# Altium PCB LUX_ZQ19.PcbDoc
Units mm, origin at the board's own origin, x right, y up, seen from the top; angles counter-clockwise.
Board outline 72.59 x 68.02 mm, 2 copper layers (Top, Bottom), stack 0.323 mm thick; 79 components, 75 nets, 256 pads, 91 vias.
Unrouted connection lines stored in the file: 1.
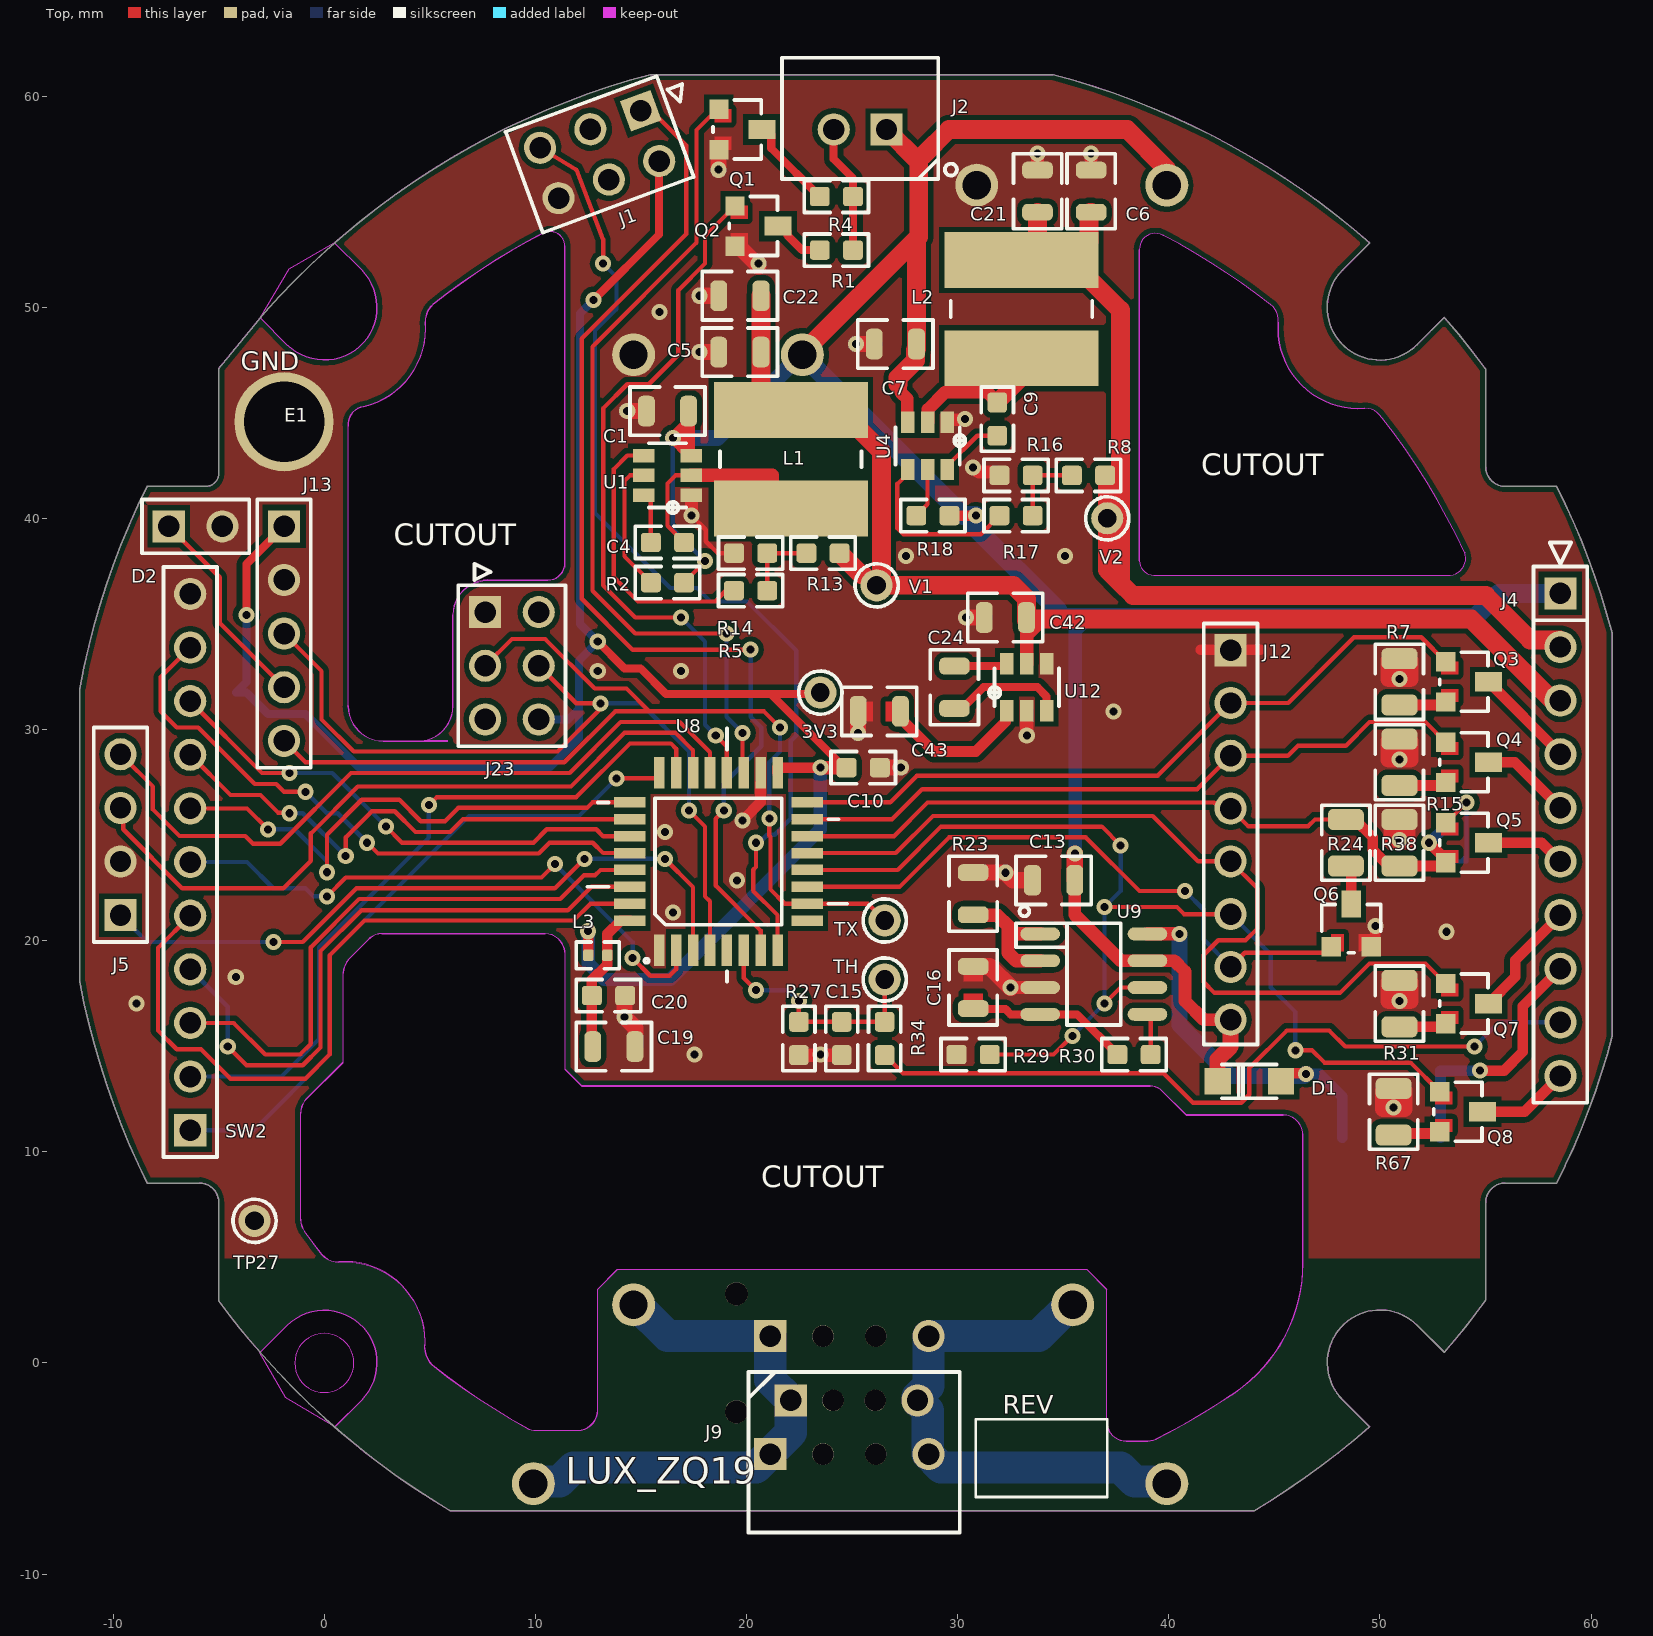
[diagram p0: Top view]
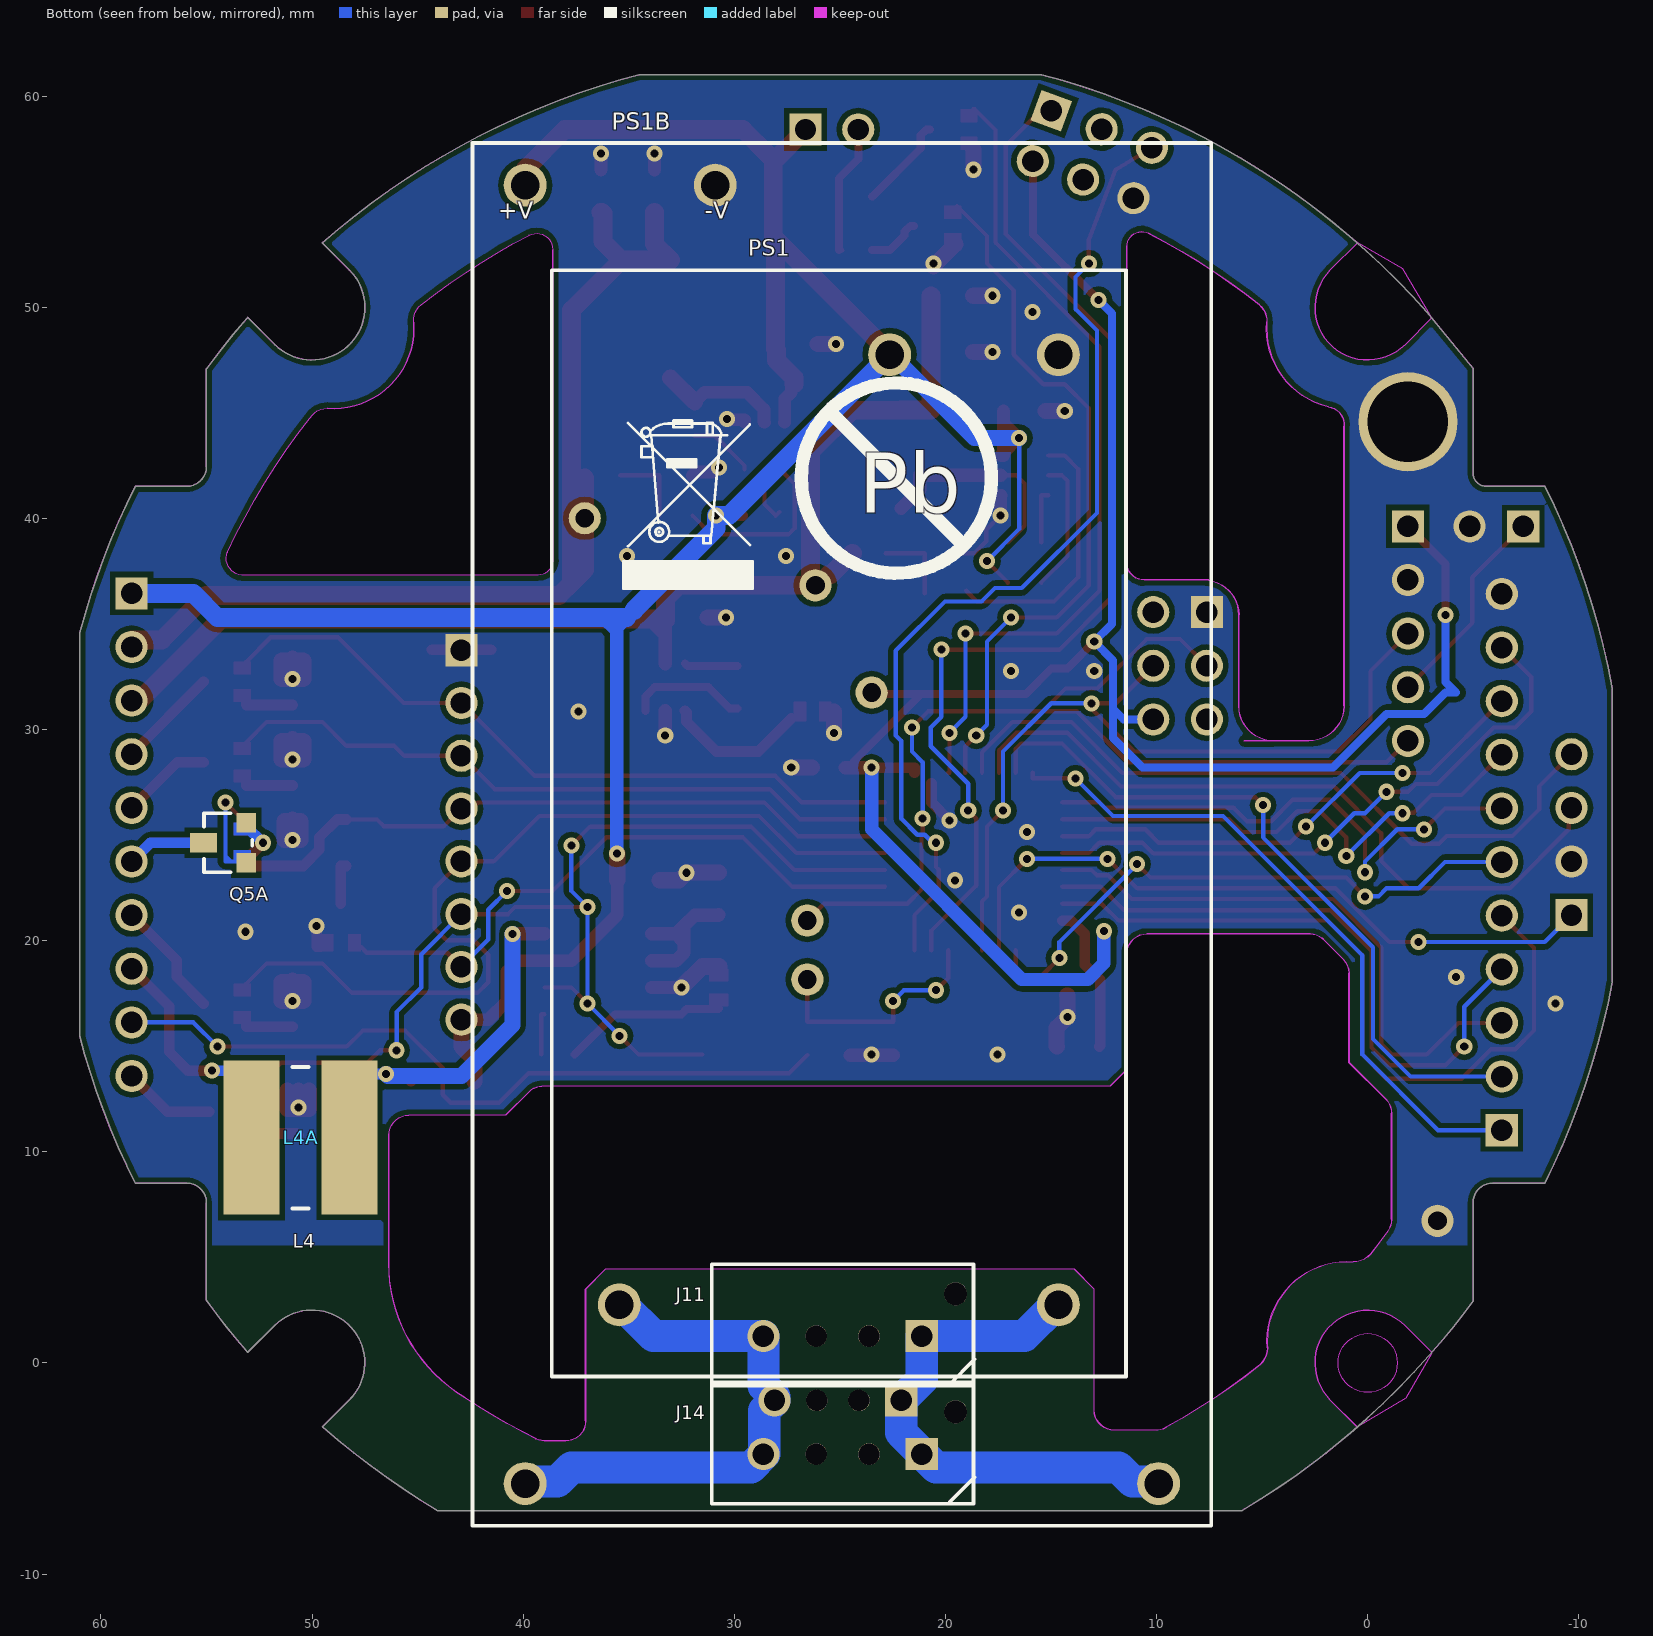
[diagram p1: Bottom view, seen from below]

## Layer stack, top to bottom
Solder Mask Top: solder mask 0.0102, Solder Resist, Dk 3.5
Top: signal copper 0.0343
Dielectric 1: dielectric 0.254, FR-4, Dk 4.3
Bottom: signal copper 0.0343
Solder Mask Bottom: solder mask 0.0102, Solder Resist, Dk 3.5

## Board outline
-11.58,18.052 -11.582,31.931 -11.583,31.927 cw(c23.315,25.648) -8.395,41.516 -5.626,41.516 -5.627,41.516 ccw(c-5.629,42.154) -4.991,42.151 -4.991,47.104 -2.816,49.759 cw(c24.918,25.226) 15.456,61.023 34.506,61.023 34.529,61.017 cw(c25.038,25.08) 49.519,53.049 48.233,51.763 ccw(c49.998,49.998) 51.763,48.233 53.05,49.519 53.055,49.514 cw(c25.608,25.551) 55.004,47.079 55.004,42.456 55.004,42.457 ccw(c55.953,42.465) 55.944,41.516 58.382,41.516 58.382,41.515 cw(c25.863,25.287) 60.998,34.582 60.998,15.456 61.006,15.485 cw(c26.008,24.697) 58.382,8.522 55.944,8.522 ccw(c55.945,7.58) 55.004,7.582 55.004,2.959 55.018,2.98 cw(c29.15,21.572) 53.043,0.501 51.768,1.775 ccw(c50.003,0.01) 48.238,-1.756 49.508,-3.026 49.498,-3.036 cw(c24.8,25.168) 44.056,-6.998 5.956,-6.998 5.938,-6.987 cw(c24.703,24.623) -2.9,0.345 cw(c19.375,20.483) -4.991,2.934 -4.991,7.582 -4.991,7.581 ccw(c-5.924,7.589) -5.931,8.522 -8.395,8.522 -8.385,8.502 cw(c24.43,24.791)
cut-out: 1.765,-1.765 0.495,-3.023 -1.816,-1.651 -3.046,0.484 -1.765,1.765 cw(c0,0)
cut-out: -1.765,48.235 -3.023,49.505 -1.651,51.816 0.484,53.046 1.765,51.765 cw(c0,50)
cut-out: -1.4,0 ccw(c0,0) 0,-1.4 ccw(c0,0) 1.4,0 ccw(c0,0) 0,1.4 ccw(c0,0)
cut-out: 2.787,29.451 ccw(c2.787,29.454) 2.787,29.451 ccw(c2.796,31.068) 2.788,29.451 ccw(c2.788,29.463) 2.788,29.451 5.842,29.451 ccw(c5.842,29.464) 5.855,29.464 ccw(c5.842,29.464) 5.842,29.477 4.731,29.477 ccw(c4.436,31.124) 6.109,31.115 ccw(c6.108,31.115) 6.109,31.115 6.109,35.433 cw(c7.756,35.424) 7.726,37.071 10.592,37.071 ccw(c10.589,37.893) 11.39,37.709 ccw(c11.398,37.719) 11.411,37.719 11.411,52.876 cw(c11.236,52.876) 11.411,52.876 ccw(c10.696,52.876) 10.385,53.521 ccw(c10.388,53.508) 10.383,53.52 ccw(c25.183,24.845) 5.139,50.134 ccw(c5.147,50.124) 5.136,50.13 ccw(c5.14,50.118) 5.131,50.128 ccw(c5.846,49.328) 4.773,49.305 ccw(c4.786,49.305) 4.774,49.303 ccw(c4.786,49.302) 4.774,49.301 cw(c0.979,48.996) 4.786,48.996 cw(c0.98,48.996) 1.858,45.293 ccw(c1.959,44.458) 1.124,44.365 ccw(c3.463,44.621) 1.124,44.364 1.124,44.365 1.124,31.115 ccw(c1.137,31.115) 1.124,31.114 cw(c1.381,31.116) 1.124,31.115 1.124,31.114 ccw(c2.797,31.124)
cut-out: -0.126,5.132 ccw(c0.7,5.902) 0.692,4.772 ccw(c0.694,4.785) 0.695,4.772 cw(c0.99,1.016) 4.758,1.016 cw(c0.994,1.016) 4.747,0.721 cw(c4.747,0.72) 4.747,0.72 cw(c4.759,0.719) 4.747,0.721 4.747,0.72 ccw(c4.76,0.719) 4.747,0.718 ccw(c5.922,0.744) 5.097,-0.094 ccw(c5.109,-0.088) 5.101,-0.098 ccw(c25.179,25.235) 9.557,-3.065 ccw(c9.564,-3.053) 9.572,-3.063 ccw(c9.585,-3.065) 9.578,-3.076 ccw(c10.001,-2.385) 10.038,-3.194 ccw(c9.966,-1.596) 10.039,-3.194 10.038,-3.194 12.008,-3.194 ccw(c12,-2.233) 12.961,-2.242 ccw(c12.954,-2.242) 12.961,-2.241 12.961,3.493 13.893,4.426 36.107,4.426 37.039,3.493 37.039,-2.75 ccw(c37.992,-2.75) 37.992,-3.702 38.99,-3.702 ccw(c38.99,-3.689) 38.992,-3.702 ccw(c38.992,-3.689) 38.993,-3.702 ccw(c38.94,-2.537) 39.383,-3.616 ccw(c39.384,-3.603) 39.39,-3.615 ccw(c26.557,22.013) 39.418,-3.601 ccw(c39.321,-3.406) 39.42,-3.6 ccw(c25.491,24.142) 42.76,-1.654 ccw(c42.753,-1.643) 42.764,-1.65 ccw(c42.762,-1.637) 42.769,-1.648 ccw(c38.922,4.728) 46.369,4.728 ccw(c39.035,4.728) 46.368,4.827 46.368,10.795 ccw(c46.362,10.795) 46.368,10.796 ccw(c46.362,10.796) 46.368,10.796 ccw(c45.408,10.788) 45.415,11.748 40.828,11.744 39.694,12.879 ccw(c39.114,12.299) 39.114,13.119 12.197,13.119 11.418,13.899 11.418,19.355 ccw(c10.687,19.358) 11.418,19.36 ccw(c10.444,19.36) 10.465,20.333 ccw(c10.465,20.333) 10.465,20.333 ccw(c10.464,20.323) 10.464,20.333 10.465,20.333 cw(c10.465,20.331) 10.465,20.333 2.726,20.333 cw(c2.726,20.323) 2.727,20.333 2.726,20.333 ccw(c2.719,19.451) 2.052,20.028 2.052,20.029 1.155,19.131 ccw(c1.163,19.123) 1.154,19.131 cw(c1.164,19.121) 1.155,19.131 1.154,19.13 ccw(c2.007,18.384) 0.876,18.459 ccw(c0.892,18.457) 0.876,18.458 0.876,14.229 -0.856,12.505 ccw(c-0.847,12.496) -0.856,12.505 ccw(c-0.844,12.493) -0.857,12.504 ccw(c-0.162,11.82) -1.137,11.83 ccw(c-1.132,11.83) -1.137,11.829 ccw(c-1.123,11.83) -1.137,11.829 cw(c-1.1,11.831) -1.137,11.829 -1.137,6.795 ccw(c-1.124,6.795) -1.137,6.794 ccw(c-1.124,6.794) -1.137,6.793 ccw(c0.024,6.862) -0.959,6.24 ccw(c-0.948,6.248) -0.957,6.238 ccw(c-0.946,6.245) -0.957,6.237 ccw(c23.626,23.837) -0.133,5.14 ccw(c-0.123,5.148) -0.129,5.137 ccw(c-0.116,5.14)
cut-out: 38.602,37.999 ccw(c39.296,38.007) 39.293,37.313 53.33,37.313 ccw(c53.26,38.111) 54.009,38.399 54.018,38.379 ccw(c23.94,24.29) 50.101,44.754 50.093,44.764 ccw(c49.28,44.254) 49.28,45.214 49.283,45.214 cw(c48.978,49.003) 45.188,49.302 45.189,49.304 ccw(c44.301,49.398) 44.831,50.117 44.84,50.11 ccw(c24.591,24.378) 39.724,53.415 39.726,53.414 ccw(c39.371,52.731) 38.602,52.731

## Design rules (kind name [scope] priority, off if disabled: settings)
Clearance Clearance_1 [All vs InPolygon] p1: gap=0.254 ignorepadtopadclearanceinfootprint=FALSE
Clearance [All] p2: gap=0.203 ignorepadtopadclearanceinfootprint=FALSE
ComponentClearance [All] p1: gap=0 collisioncheckmode=3 verticalgap=0 showdistances=FALSE
FanoutControl Fanout_LCC [IsLCC] p1: bgadir=Out bgaviamode=Centered fanoutstyle=Auto fanoutdirection=Alternating viagrid=0.025 // Fanout_LCC (Default Rule)
FanoutControl Fanout_BGA [IsBGA] p2: bgadir=Out bgaviamode=Centered fanoutstyle=Auto fanoutdirection=Alternating viagrid=0.025 // Fanout_BGA (Default Rule)
FanoutControl Fanout_Small [(CompPinCount < 5)] p3: bgadir=Out bgaviamode=Centered fanoutstyle=Auto fanoutdirection=OutThenIn viagrid=0.025 // Fanout_Small (Default Rule)
FanoutControl Fanout_SOIC [IsSOIC] p4: bgadir=Out bgaviamode=Centered fanoutstyle=Auto fanoutdirection=Alternating viagrid=0.025 // Fanout_SOIC (Default Rule)
HoleSize [All] p1: absolutevalues=TRUE maxlimit=5.08 minlimit=0.025 maxpercent=80.000 minpercent=20.000
HoleToHoleClearance [All] p1: gap=0 allowstackedmicrovias=TRUE
MinimumSolderMaskSliver [All] p1: minsoldermaskwidth=0
PolygonConnect [All] p1: connectstyle=Direct reliefconductorwidth=0.254 reliefentries=4 polygonreliefangle="90 Angle" airgapwidth=0.254
RoutingVias [All] p1: holewidth=0.381 width=0.762 viastyle="Through Hole" minholewidth=0.381 minwidth=0.762 maxholewidth=0.711 maxwidth=1.27
SilkToSilkClearance [All] p1: silktosilkclearance=0
SilkToSolderMaskClearance [IsPad] p1: minsilkscreentomaskgap=0 clearancetoexposedcopper=TRUE
SolderMaskExpansion [All] p1: expansion=0.102 istentingtop=FALSE
Width [All] p1: maxlimit=2.54 minlimit=0.127 preferedwidth=0.203
20 further rules are at their usual default settings.

## Components (designator, comment, footprint, x,y, rotation, side; value= is the part's Value field where it differs from the comment)
3V3 "0.035" 0.035 23.495,31.75 r0 top
C1 "_0805" _0805 16.256,45.085 r180 top
C4 "_0603" _0603 16.256,38.862 r0 top
C5 "_0805" _0805 19.685,47.879 r180 top
C6 "_0805" _0805 36.322,55.499 r90 top
C7 "_0805" _0805 27.051,48.26 r180 top
C9 "_0603" _0603 31.877,44.704 r90 top
C10 "_0603" _0603 25.527,28.194 r0 top
C13 "_0805" _0805 34.544,22.86 r180 top
C15 "_0603" _0603 24.511,15.367 r270 top
C16 "_0805C" _0805C 30.734,17.78 r90 top
C19 "_0805" _0805 13.716,14.986 r0 top
C20 "_0603" _0603 13.462,17.399 r0 top
C21 "_0805" _0805 33.782,55.499 r90 top
C22 "_0805" _0805 19.685,50.546 r180 top
C24 "_0805" _0805 29.845,32.004 r270 top
C42 "_0805" _0805 32.258,35.306 r180 top
C43 "_0805C" _0805C 26.289,30.861 r180 top
D1 "SOD123F" SOD123F 43.815,13.335 r0 top
D2 "SIP-2P" SIP-2P -7.366,39.624 r0 top
E1 "HOLE128AA" HOLE128AA -1.905,44.577 r0 top
J1 "2X3" 2X3 14.986,59.309 r200.22 top
J2 "JST1X2" JST1X2 25.38,58.42 r0 top
J4 "SIP-10" SIP-10 58.547,36.449 r270 top
J5 "SIP-4PA" SIP-4PA -9.652,21.209 r90 top
J9 "JST1X4-2AA" JST1X4-2AA 22.098,-1.778 r180 top
J11 "JST1X4-2" JST1X4-2 21.122,1.27 r180 bottom
J12 "SIP-8P_2.5MM" SIP-8P_2.5MM 42.926,33.757 r270 top
J13 "SIP-5P" SIP-5P -1.905,39.624 r270 top
J14 "JST1X4-2" JST1X4-2 21.122,-4.318 r180 bottom
J23 "2X3" 2X3 7.62,35.56 r270 top locked
L1 "IND.6.7MM" IND.6.7MM 22.098,42.799 r270 top (schematic designator L2)
L2 "IND.6.7MM" IND.6.7MM 33.02,49.911 r270 top
L3 "_0402" _0402 12.954,19.304 r180 top
L4 "IND.6.7MM" IND.6.7MM 50.546,10.668 r180 bottom
L4A "IND.6.7MM" IND.6.7MM 50.546,10.668 r180 bottom
PS1 "Comment" THRUHOLEPS 14.648,2.752 r90 bottom locked
PS1B "Comment" "THRUHOLEPS - duplicate" 39.906,-5.715 r180 bottom locked
Q1 "SOT23-323" SOT23-323 19.685,58.42 r270 top
Q2 "SOT23-323" SOT23-323 20.447,53.848 r270 top
Q3 "SOT23-323" SOT23-323 54.102,32.258 r270 top
Q4 "SOT23-323" SOT23-323 54.102,28.448 r270 top
Q5 "SOT23-323" SOT23-323 54.102,24.638 r270 top
Q5A "SOT23-323" SOT23-323 54.102,24.638 r90 bottom
Q6 "SOT23-323" SOT23-323 48.641,20.701 r0 top
Q7 "SOT23-323" SOT23-323 54.102,17.018 r270 top
Q8 "SOT23-323" SOT23-323 53.823,11.895 r270 top
R1 "_0603" _0603 24.257,52.705 r0 top
R2 "_0603" _0603 16.256,36.957 r180 top
R4 "_0603" _0603 24.257,55.245 r0 top (schematic designator R1)
R5 "_0603" _0603 20.193,36.576 r0 top
R7 "_0805A" _0805A 50.927,32.258 r270 top
R8 "_0603" _0603 36.195,42.037 r180 top
R13 "_0603" _0603 23.622,38.354 r180 top
R14 "_0603" _0603 20.193,38.354 r180 top
R15 "_0805A" _0805A 50.927,28.448 r270 top
R16 "_0603" _0603 32.766,42.037 r180 top
R17 "_0603" _0603 32.766,40.132 r0 top
R18 "_0603" _0603 28.829,40.132 r180 top
R23 "_0805" _0805 30.734,22.225 r270 top
R24 "_0805A" _0805A 48.387,24.638 r270 top
R27 "_0603" _0603 22.479,15.367 r270 top
R29 "_0603" _0603 30.734,14.605 r180 top
R30 "_0603" _0603 38.354,14.605 r0 top
R31 "_0805A" _0805A 50.927,17.018 r270 top
R34 "_0603" _0603 26.543,15.367 r90 top
R38 "_0805A" _0805A 50.927,24.638 r270 top
R67 "_0805A" _0805A 50.648,11.895 r270 top
SW2 "SIP-11PA" SIP-11PA -6.35,11.024 r90 top
TH "0.035" 0.035 26.543,18.161 r0 top
TP27 "0.035" 0.035 -3.302,6.731 r0 top
TX "0.035" 0.035 26.543,20.955 r0 top
U1 "TSOT2-6" TSOT2-6 16.256,42.037 r90 top
U4 "TSOT2-6" TSOT2-6 28.575,43.434 r180 top
U8 "TQFP-32" TQFP-32 18.669,23.749 r90 top
U9 "SOIC-8" SOIC-8 36.449,18.415 r270 top
U12 "TSOT2-6" TSOT2-6 33.274,32.004 r0 top
V1 "0.035" 0.035 26.162,36.83 r0 top (schematic designator TP32)
V2 "0.035" 0.035 37.084,40.005 r0 top (schematic designator TP31)

## Footprints (in the part's own frame and the unit in brackets; to place one, negate y for a bottom-side part, rotate by r counter-clockwise, add the part's x,y. Pads: shape width x height; smd on the part's side, far side on the other; paste and mask are expansions set on the pad)
0.035 [mil]
  round 60 hole 35: 1(0,0)
  silkscreen extent -40,-40 40,40
2X3 [mil]
  rect 60x60 / inner round 60 / far side rect 60x60 hole 40: 1(0,0)
  round 60 hole 40: 2(0,100) 3(100,0) 4(100,100) 5(200,0) 6(200,100)
  silkscreen extent -90,-50 250,150
_0402 [mm]
  rrect40% 0.5x0.55 smd: 1(-0.45,0) 2(0.45,0)
  silkscreen extent -1.02,-0.64 1.02,0.64
_0603 [mil]
  rrect31% 37x36 smd: 1(-31,0) 2(31,0)
  silkscreen extent -60,-30 60,30
_0805 [mm]
  rrect62% 0.8x1.45 smd: 1(-1,0) 2(1,0)
  silkscreen extent -1.78,-1.14 1.78,1.14
_0805A [mm]
  rrect50% 1x1.7 smd: 1(-1.1,0) 2(1.1,0)
  silkscreen extent -1.78,-1.14 1.78,1.14
_0805C [mm]
  rrect62% 0.8x1.45 smd: 1(-1,0) 2(1,0)
  Top region: 0.889,0.457 0.305,0.457 0.305,-0.457 0.889,-0.457 0.889,0.457
  Top region: -0.305,0.457 -0.889,0.457 -0.889,-0.457 -0.305,-0.457 -0.305,0.457
  silkscreen extent -1.78,-1.14 1.78,1.14
HOLE128AA [mil]
  round 185 / inner round 150 / far side round 185 hole 150: 1(0,0)
IND.6.7MM [mm]
  rect 2.65x7.3 smd: 1(-2.325,0) 2(2.325,0)
  silkscreen extent -0.38,-3.35 0.38,3.35
JST1X2 [mil]
  rect 60x60 / inner round 55.12 / far side rect 60x60 hole 40: 1(49.21,0)
  round 60 / inner round 55.12 / far side round 60 hole 40: 2(-49.21,0)
  silkscreen extent -146,-93 180,134
JST1X4-2 [mil]
  rect 60x60 / inner round 55.12 / far side rect 60x60 hole 40: 1(0,0)
  round 40 / inner round 55.12 / far side round 40 hole 40 unplated: 2(-196.85,0) 3(-98.43,0)
  round 60 / inner round 55.12 / far side round 60 hole 40: 4(-295.28,0)
  round 43 / inner round 43.31 / far side round 43 hole 43 unplated: 5(62.99,78.74)
  silkscreen extent -392,-93 98,134
JST1X4-2AA [mil]
  rect 60x60 / inner round 55.12 / far side rect 60x60 hole 40: 1(0,0)
  round 40 / inner round 55.12 / far side round 40 hole 40 unplated: 2(-157.48,0) 3(-78.74,0)
  round 60 / inner round 55.12 / far side round 60 hole 40: 4(-236.22,0)
  silkscreen extent -315,-53 79,246
SIP-2P [mil]
  rect 60x60 / inner round 60 / far side rect 60x60 hole 40: 1(0,0)
  round 60 / inner round 60 / far side rrect100% 60x60 hole 40: 2(100,0)
  silkscreen extent -50,-50 150,50
SIP-4PA [mil]
  rect 60x60 / inner round 60 / far side rect 60x60 hole 40: 1(0,0)
  round 60 hole 40: 2(100,0) 3(200,0) 4(300,0)
  silkscreen extent -50,-50 350,50
SIP-5P [mil]
  rect 60x60 / inner round 60 / far side rect 60x60 hole 40: 1(0,0)
  round 60 hole 40: 2(100,0) 3(200,0) 4(300,0) 5(400,0)
  silkscreen extent -50,-50 450,50
SIP-8P_2.5MM [mil]
  rect 60x60 / inner round 60 / far side rect 60x60 hole 40: 1(0,0)
  round 60 hole 40: 2(98.43,0) 3(196.85,0) 4(295.28,0) 5(393.7,0) 6(492.13,0) 7(590.55,0) 8(688.98,0)
  silkscreen extent -50,-50 735,50
SIP-10 [mil]
  rect 60x60 / inner round 60 / far side rect 60x60 hole 40: 1(0,0)
  round 60 hole 40: 2(100,0) 3(200,0) 4(300,0) 5(400,0) 6(500,0) 7(600,0) 8(700,0) 9(800,0) 10(900,0)
  silkscreen extent -95,-50 950,50
SIP-11PA [mil]
  rect 60x60 / inner round 60 / far side rect 60x60 hole 40: 1(0,0)
  round 60 hole 40: 2(100,0) 3(200,0) 4(300,0) 5(400,0) 6(500,0) 7(600,0) 8(700,0) 9(800,0) 10(900,0) 11(1000,0)
  silkscreen extent -50,-50 1050,50
SOD123F [mm]
  rrect0% 1.25x1.25 smd: 1(-1.5,0) 2(1.5,0)
  silkscreen extent -1.3,-0.8 1.3,0.8
SOIC-8 [mil]
  oval 24x74 smd: 1(-75,-100) 2(-25,-100) 3(25,-100) 4(75,-100) 5(75,100) 6(25,100) 7(-25,100) 8(-75,100)
  silkscreen extent -126,-145 95,50
SOT23-323 [mil]
  rect 36x36 smd: 1(-37.5,-39) 2(37.5,-39)
  rect 36x50 smd: 3(0,41)
  Top region: -13.78,-47.24 -37.4,-47.24 -37.4,-15.75 -13.78,-15.75 -13.78,-47.24
  Top region: 13.78,-47.24 37.4,-47.24 37.4,-15.75 13.78,-15.75 13.78,-47.24
  silkscreen extent -55,-50 55,40
THRUHOLEPS [mil]
  round 80 hole 53: +VO(1771.65,314.96) -VO(1771.65,0) ACL(0,0) ACN(0,818.9)
  silkscreen extent -134,-126 1929,945
"THRUHOLEPS - duplicate" [mil]
  round 80 hole 53: +VO(0,2421.26) -VO(354.33,2421.26) ACL(0,0) ASN(1181.1,0)
  silkscreen extent -98,-79 1280,2500
TQFP-32 [mm]
  rect 1.5x0.5 smd: 1(-4.2,2.8) 2(-4.2,2) 3(-4.2,1.2) 4(-4.2,0.4) 5(-4.2,-0.4) 6(-4.2,-1.2) 7(-4.2,-2) 8(-4.2,-2.8) 17(4.2,-2.8) 18(4.2,-2) 19(4.2,-1.2) 20(4.2,-0.4) 21(4.2,0.4) 22(4.2,1.2) 23(4.2,2) 24(4.2,2.8)
  rect 0.5x1.5 smd: 9(-2.8,-4.2) 10(-2,-4.2) 11(-1.2,-4.2) 12(-0.4,-4.2) 13(0.4,-4.2) 14(1.2,-4.2) 15(2,-4.2) 16(2.8,-4.2) 25(2.8,4.2) 26(2,4.2) 27(1.2,4.2) 28(0.4,4.2) 29(-0.4,4.2) 30(-1.2,4.2) 31(-2,4.2) 32(-2.8,4.2)
  silkscreen extent -5.7,-6.1 6.3,6.2
TSOT2-6 [mil]
  rect 25x40 smd: 1(-37,-44) 2(0,-44) 3(37,-44) 4(37,44) 5(0,44) 6(-37,44)
  silkscreen extent -70,-35 60,35

## Part data
3V3 TH TP27 TX V1 V2: library part "TEST POINT_1"
C1 C5 C6 C7 C13 C16 C19 C21 C22 C24 C42 C43: library part "CAPACITOR POL/SM"
C4 C9 C10 C15 C20: library part "CAPACITOR NON-POL"
D1: library part "DIODE SCHOTTKY_0"
D2: library part LED
E1: library part hole_0
J1: library part CON8AP_0
J2: library part CON2
J4: library part "HEADER 10"
J5: library part CON4AP_5
J9 J11 J14: library part CON4_8
J12: library part "HEADER 10_0"
J13: library part CON4_9
J23: library part "CONN SOCKET 6x2_0"
L1 L2 L3 L4 L4A: library part "INDUCTOR FERRITE/SM"
PS1: library part VOFM-5-5
PS1B: library part VOFM-5-5_5
Q1 Q2 Q3 Q4 Q5 Q5A Q6 Q7 Q8: library part "N DGS_0"
R1 R4 R27 R34: library part RESISTOR/SM
R2 R5 R7 R8 R13 R14 R15 R16 R17 R18 R23 R24 R29 R30 R31 R38 R67: library part RESISTOR
SW2: library part CON4_10
U1 U4: library part NCP3170_0
U8: library part Xmega8E5
U9: library part NCL30160
U12: library part IC,VREG,LDO,3_1.3V,AP2210, "LM2665"

## Via types
v1: diameter 0.762, hole 0.381, Top to Bottom, 89 vias
v2: diameter 0.762, hole 0.381, Top to Bottom, tented both sides, 2 vias

## Nets (pads, with @x,y where several pads share a name; then routed paths per layer and width w, separated by ;. In a path a pad name is that pad's centre, name@x,y a point inside that pad or via, vN(x,y) a via of type N, cw(c..) or ccw(c..) an arc to the next point about the centre after c; other vN are vias at no path point)
+3V3: 3V3.1 C10.1 J1.2 J13.1 J23.6 L3.2 U8.17 | length 98.7
  Top w0.381: v1(-3.683,35.433) -3.683,37.846 J13.1 ; v1(12.751,50.343) 15.864,53.456 J1.2 ; v1@12.881,34.236 14.224,32.893 14.986,32.893 16.192,31.686 21.146,31.686 ; 3V3.1 23.431,31.686 21.146,31.686 ; C10.1@24.32,28.194 24.32,28.512 21.146,31.686
  Top w0.508: v1(12.497,20.447) 12.504,20.396 L3.2 ; U8.17 21.469,28.194 v1(23.495,28.194)
  Top w0.635: v1(23.495,28.194) 24.32,28.194 C10.1
  Bottom w0.381: v1(-3.683,35.433) -3.683,32.258 -4.191,31.75 -3.683,31.75 -2.667,30.734 -0.889,30.734 1.651,28.194 10.668,28.194 12.065,29.591 12.065,30.988 ; J23.6 11.557,30.48 12.065,30.988 ; v1(12.751,50.343) 12.116,49.708 12.116,35.001 v1(12.954,34.163) 12.065,33.274 12.065,30.988
  Bottom w0.635: v1(12.497,20.447) 12.497,18.923 13.259,18.161 16.383,18.161 23.495,25.273 v1(23.495,28.194)
+6V5: C5.1 C22.1 C42.1 J4.3 L1.1 R13.1 U12.5 V1.1 | length 58.3
  Top w0.635: C42.1@33.258,35.179 33.274,35.163 33.274,34.468 ; U12.5 33.274,34.468 ; 34.036,35.23 33.274,34.468
  Top w0.889: C22.1 20.685,45.13 L1.1@22.098,45.13 ; L1.1 24.423,45.124 26.396,43.151 26.396,37.236 26.162,37.002 V1.1 32.639,36.83 33.258,36.211 C42.1@33.258,35.23 ; R13.1 24.422,38.354 25.438,37.338 25.527,37.338 ; C42.1@33.258,35.179 C42.1@33.258,35.23 ; J4.3 58.191,31.369 54.331,35.23 34.036,35.23 C42.1@33.258,35.23
+7V5: C6.1 C21.1 J4.2 L2.1 R8.1 V2.1 | length 51
  Top w0.889: C21.1 33.782,52.998 L2.1 L2.1@35.345,52.236 ; C6.1 36.27,54.499 36.226,54.455 36.226,53.117 L2.1@35.345,52.236 ; R8.1@37.084,41.91 V2.1 37.084,37.567 37.713,36.937 ; J4.2@58.522,34.239 57.112,34.239 55.018,36.347 38.303,36.347 37.713,36.937 ; L2.1@35.345,52.236 37.713,49.868 37.713,36.937
+12V: C1.1 C7.1 C13.1 D1.1 J2.1 J4.1 J12.8 PS1.+VO PS1B.+VO R2.1 R18.1 U1.3 U4.3 U9.7 | length 128.2
  Top w0.203: R2.1 17.043,36.963 18.034,37.954 v1(18.034,37.973) ; v1@35.544,24.13 v1(35.56,24.13)
  Top w0.508: U1.3@17.256,43.053 16.51,43.799 v1(16.51,43.815) 16.51,43.831 C1.1@17.256,44.577 ; R18.1 v1(30.861,40.132)
  Top w0.6: 27.306,46.355 27.306,45.968 27.618,45.656 27.618,44.569 U4.3
  Top w0.61: v1(16.51,43.815) 17.256,43.815 ; C1.1 17.256,44.577 17.256,43.815 ; U1.3 17.256,42.977 17.256,43.053 17.256,43.815 ; C13.1 35.544,21.225 37.719,19.05 U9.7 40.259,19.05 40.767,18.542 40.767,17.145 41.656,16.256 J12.8
  Top w0.762: C13.1 v1@35.544,24.13 ; D1.1 42.315,14.375 42.926,14.986 J12.8
  Top w0.889: PS1.+VO@22.838,48.028 28.051,53.24 ; J2.1 28.154,56.896 28.154,53.343 28.051,53.24 ; 27.179,46.355 27.179,46.664 28.007,47.492 28.007,47.979 28.051,48.024 C7.1 28.051,53.24 ; 28.378,57.207 29.591,58.42 38.033,58.42 PS1B.+VO@39.906,56.547
  Bottom w0.203: v1(16.51,43.815) 16.51,39.497 v1(18.034,37.973)
  Bottom w0.635: 34.755,35.644 35.093,35.306 35.56,34.839 ; v1(35.56,24.13) 35.56,34.671 ; 35.56,35.306 35.56,34.839 ; 36.195,35.306 35.56,34.671 ; 35.56,34.671 35.56,34.839
  Bottom w0.762: v1(16.51,43.815) 18.626,43.815 PS1.+VO@22.605,47.794
  Bottom w0.889: PS1.+VO 30.267,40.132 v1(30.861,40.132) 30.861,39.538 30.881,39.518 34.755,35.644 ; 35.093,35.306 35.56,35.306 36.195,35.306 54.483,35.306 55.626,36.449 J4.1
_UNPAIR: J13.3 J23.4 U8.4 | length 38.4
  Top w0.203: J13.3 -0.127,32.766 -0.127,30.48 1.397,28.956 11.049,28.956 12.974,30.881 12.974,31.135 v1(13.081,31.242) 11.938,31.242 J23.4 ; v1(17.272,26.162) 18.034,25.4 18.034,22.098 18.269,21.863 U8.4
  Bottom w0.203: v1(13.081,31.242) 14.986,31.242 17.272,28.956 v1(17.272,26.162)
AUX_RX: J5.3 U8.22 | length 34.4
  Top w0.203: J5.3 -9.525,26.162 -9.525,25.273 -6.731,22.479 -1.937,22.479 -0.635,23.781 -0.635,25.082 1.587,27.305 11.684,27.305 14.224,29.845 16.637,29.845 17.469,29.013 U8.22
DMX_TX: J13.5 J23.3 TX.1 U8.10 | length 49.4
  Top w0.203: J13.5@-1.651,29.464 J13.5 -0.889,28.448 11.366,28.448 13.779,30.861 15.392,30.861 ; J23.3 8.89,34.29 10.46,34.29 12.809,31.941 14.312,31.941 15.392,30.861 ; v1(21.082,25.781) 21.082,24.973 21.133,24.922 21.133,22.428 21.812,21.749 25.749,21.749 TX.1 ; v1(21.59,30.099) 20.828,30.861 15.392,30.861
  Bottom w0.203: J13.5@-2.083,29.286 J13.5 ; v1(21.082,25.781) 21.082,28.448 21.59,28.956 v1(21.59,30.099)
FAN_ENA: Q2.1 U8.20 | length 33.7
  Top w0.203: v1(16.891,35.306) 14.732,35.306 13.208,36.83 13.208,45.212 14.351,46.355 15.367,46.355 16.764,47.752 16.764,50.8 18.034,52.07 18.034,53.378 Q2.1 ; v1(18.542,29.718) 19.05,29.21 19.069,29.21 U8.20
  Bottom w0.203: v1(16.891,35.306) 18.034,34.163 18.034,30.226 v1(18.542,29.718)
FAN_FAST: Q1.1 U8.19 | length 39.5
  Top w0.203: Q1.1 18.605,59.372 17.628,58.395 17.628,53.061 12.7,48.133 12.7,36.576 14.732,34.544 v1(19.05,34.544) ; v1(19.812,29.845) 19.812,27.949 U8.19
  Bottom w0.203: v1(19.05,34.544) 19.05,30.607 v1(19.812,29.845)
GND_POWER.GLOBAL: C1.2 C5.2 C6.2 C7.2 C10.2 C13.2 C15.2 C16.2 C19.2 C20.2 C21.2 C22.2 C42.2 C43.2 D2.2 E1.1 J1.6 J5.2 J12.1 J13.2 J23.1 PS1.-VO PS1B.-VO Q1.2 Q2.2 Q6.2 R7.1 R14.2 R15.1 R16.2 R23.1 R27.2 R29.2 R31.1 R38.1 R67.1 SW2.11 TP27.1 U1.1 U4.1 U8.1 U8.18 U9.3 U12.2 U12.4 | length 57.9
  Top w0.203: v1(17.399,40.132) 18.068,39.463 18.068,38.916 18.631,38.354 R14.2
  Top w0.508: v1(19.818,25.691) 19.818,25.703 20.665,26.549 U8.18@20.665,27.453 ; 41.529,33.782 44.323,33.782 ; Q6.2 49.784,19.71 v1(49.784,20.701)
  Top w0.61: U1.1 17.399,41.097 v1(17.399,40.132) ; U4.1 29.515,44.662 29.527,44.675 30.324,44.675 v2(30.353,44.704) ; v1(30.734,42.418) 30.775,42.418 31.004,42.189 31.826,42.189 R16.2 ; C21.2@33.779,56.499 33.782,56.502 v1(33.782,57.277) ; C6.2 v1(36.322,57.277) ; v1@53.12,20.392 v1(53.149,20.422)
  Top w0.635: R27.2 v1@23.495,14.58 ; v1(23.495,14.605) v1@23.495,14.58 ; C15.2 v1@23.495,14.58 ; v1(32.512,17.78) U9.3 ; v1(33.274,29.718) U12.2
  Top w0.762: C20.2 14.224,17.399 v1(14.224,16.383) 14.732,15.875 14.732,15.002 C19.2 ; v1(14.351,45.085) C1.2 ; v1(17.78,47.879) C5.2 ; v1(17.78,50.546) C22.2 ; v1(18.669,56.515) 18.669,57.468 Q1.2 ; Q2.2@19.533,52.984 20.574,51.943 v1(20.574,52.07) ; v1(25.187,48.26) C7.2 ; v1(25.273,29.845) 25.273,30.845 C43.2 ; C10.2 v1(27.305,28.194) ; v1(30.394,35.306) C42.2 ; R23.1 32.258,23.225 v1(32.258,23.216) 32.614,22.86 C13.2 ; R67.1@50.14,12.911 50.14,12.022 v1@50.648,12.022 ; R67.1@50.648,12.911 v1(50.648,12.106) v1@50.648,12.022 ; R31.1 R31.1@50.927,18.034 ; R38.1 R38.1@50.927,25.654 ; R15.1 R15.1@50.927,29.464 ; R7.1 R7.1@50.927,33.274 ; R67.1@51.156,12.911 51.156,12.022 v1@50.648,12.022 ; v1(50.927,17.145) 51.435,17.145 51.435,18.034 R31.1@50.927,18.034 ; v1(50.927,17.145) R31.1@50.927,18.034 ; v1(50.927,17.145) 50.419,17.145 50.419,18.034 R31.1@50.927,18.034 ; v1(50.927,24.765) R38.1@50.927,25.654 ; v1(50.927,24.765) 50.546,24.765 50.546,25.654 R38.1@50.927,25.654 ; v1(50.927,24.765) 51.308,24.765 51.308,25.654 R38.1@50.927,25.654 ; v1(50.927,28.575) 51.435,28.575 51.435,29.464 R15.1@50.927,29.464 ; v1(50.927,28.575) R15.1@50.927,29.464 ; v1(50.927,28.575) 50.419,28.575 50.419,29.464 R15.1@50.927,29.464 ; v1(50.927,32.385) 50.419,32.385 50.419,33.274 R7.1@50.927,33.274 ; v1(50.927,32.385) 51.435,32.385 51.435,33.274 R7.1@50.927,33.274 ; v1(50.927,32.385) R7.1@50.927,33.274
  Top w0.813: C16.2 31.512,18.78 v1(32.512,17.78)
  other v1: 17.526,14.605 -8.89,17.018 -4.191,18.288 16.51,21.336 19.558,22.86 16.129,25.146 37.389,30.861 12.954,32.766 16.891,32.766 27.559,38.227 35.077,38.227 15.875,49.784
N00593: J1.1 U8.7 | length 51.6
  Top w0.203: J1.1 15.494,59.309 17.145,57.658 17.145,53.467 12.192,48.514 12.192,36.195 14.605,33.782 v1(20.193,33.782) ; v1(18.923,26.162) 18.542,25.781 18.542,22.606 20.669,20.479 U8.7
  Bottom w0.203: v1(18.923,26.162) 18.923,27.432 20.701,29.21 20.701,30.099 20.193,30.607 v1(20.193,33.782)
N01881: 
N01906: 
N06339: C19.1 C20.1 L3.1 U8.32 | length 7
  Top w0.508: C19.1 12.675,15.027 C20.1 12.675,18.136 13.404,18.865 L3.1 13.404,20.314 14.039,20.949 U8.32
N10759: J4.4 Q3.3 | length 4.8
  Top w0.508: Q3.3 58.547,28.854 J4.4
N10771: J4.5 Q4.3 | length 4.3
  Top w0.508: Q4.3 56.388,28.448 J4.5
N11231: C15.1 R27.1 R34.2 TH.1 U8.6 | length 11.4
  Top w0.203: U8.6 19.869,18.231 v1(20.447,17.653) ; v1(22.479,17.145) R27.1 C15.1 R34.2 TH.1
  Bottom w0.203: v1(20.447,17.653) 21.971,17.653 v1(22.479,17.145)
N11658: J2.2 R1.2 R4.2 | length 6.2
  Top w0.203: R1.2@24.892,52.705 R1.2
  Top w0.381: J2.2 24.13,57.023 25.044,56.109 R4.2 R1.2
N63653: Q1.3 Q2.3 R1.1 R4.1 | length 7
  Top w0.381: Q1.3 20.904,58.42 21.171,58.153 21.171,57.531 23.457,55.245 R4.1 ; Q2.3 21.666,53.848 21.933,53.581 21.933,53.404 22.631,52.705 R1.1
N168532: Q3.2 R7.2 | length 2.3
  Top w0.508: R7.2 53.111,31.158 Q3.2
N168576: 
N219536: Q4.2 R15.2 | length 2.3
  Top w0.508: R15.2 53.111,27.348 Q4.2
N219580: 
N342907: Q7.2 R31.2 | length 2.3
  Top w0.508: R31.2 53.111,15.918 Q7.2
N343067: J4.7 Q7.3 | length 5.6
  Top w0.508: Q7.3 56.413,18.288 56.413,19.075 J4.7
N782700: C9.1 U4.6 | length 3.1
  Top w0.203: U4.6 29.515,42.507 30.924,43.917 C9.1 C9.1@31.877,43.929
N783582: C9.2 L2.2 U4.2 | length 6.1
  Top w0.6: U4.2 28.593,44.569 28.593,45.166 29.4,45.974 31.407,45.974 C9.2@31.877,45.504
  Top w0.8: C9.2@31.877,45.504 L2.2@33.02,46.647
N784520: R17.1 U4.4 | length 8.3
  Top w0.203: U4.4 27.635,42.126 27.145,41.636 27.145,39.53 27.432,39.243 31.09,39.243 R17.1
N786404: R8.2 R16.1 R17.2 | length 3.8
  Top w0.203: R17.2 R16.1 R8.2
N794060: R18.2 U4.5 | length 2.7
  Top w0.203: R18.2@27.869,40.305 R18.2 28.042,40.141 28.575,40.674 U4.5
N803464: R2.2 U1.5 | length 6.4
  Top w0.203: U1.5 14.478,42.037 14.224,41.783 14.224,38.202 R2.2
N803510: C4.1 U1.6 | length 2.6
  Top w0.203: U1.6 15.469,41.097 C4.1
N803530: C4.2 L1.2 U1.2 | length 10.2
  Top w0.203: C4.2 16.256,39.649 16.256,41.656 16.637,42.037 U1.2
  Top w0.635: U1.2 21.209,42.037 21.209,41.363 L1.2
N803542: R5.1 U1.4 | length 12.8
  Top w0.203: U1.4 14.351,42.977 13.716,42.342 13.716,37.211 14.859,36.068 18.517,36.068 R5.1@19.018,36.57
N803586: R5.2 R13.2 R14.1 | length 3.8
  Top w0.203: R5.2@20.98,36.449 R14.1 R13.2
N837098: D1.2 L4.2 L4A.2 U9.8 | length 18.6
  Top w0.508: D1.2 45.315,13.716 46.465,13.716 v1(46.496,13.685)
  Top w0.635: U9.8 v1(40.513,20.32)
  Bottom w0.508: v1(46.496,13.685) 47.15,13.685 48.221,12.614 L4A.2
  Bottom w0.762: v1(40.513,20.32) 40.513,16.002 42.926,13.589 46.4,13.589 v1(46.496,13.685)
N837208: R30.2 U9.5 | length 2.1
  Top w0.203: U9.5 39.141,16.51 R30.2
N837212: C16.1 R30.1 U9.4 | length 7.7
  Top w0.381: C16.1 30.75,16.764 32.258,16.764 32.512,16.51 U9.4 35.662,16.51 R30.1
N837360: R23.2 U9.1 U9.2 | length 7
  Top w0.635: R23.2 30.75,21.209 31.877,21.209 32.385,20.701 ; U9.2 32.766,19.05 32.385,19.431 32.385,19.939 ; U9.1 32.766,20.32 ; 32.385,19.939 32.766,20.32 ; 32.385,19.939 32.385,20.701 ; 32.385,20.701 32.766,20.32
N837532: J4.8 L4.1 L4A.1 | length 12.1
  Top w0.508: v1(54.737,13.843) 55.88,13.843 56.769,14.732 56.769,16.891 J4.8
  Bottom w0.508: L4A.1 52.871,13.843 v1(54.737,13.843)
N932039: U8.5
N953396: 
N953927: Q6.3 R24.2 | length 2
  Top w0.508: R24.2 48.641,23.538 Q6.3
N959513: 
N988707: SW2.6 U8.2 | length 28
  Top w0.203: v1(0.127,22.098) 1.016,22.987 10.287,22.987 v1(10.922,23.622) ; v1(14.605,19.177) 15.443,18.339 16.358,18.339 16.669,18.65 U8.2
  Bottom w0.203: SW2.6 -3.658,23.724 -2.413,22.479 -0.889,22.479 -0.508,22.098 v1(0.127,22.098) ; v1(10.922,23.622) 14.605,19.939 v1(14.605,19.177)
N1039649: SW2.5 U8.31 | length 35.5
  Top w0.203: SW2.5 -7.874,19.66 -7.874,15.748 -6.985,14.859 -5.842,14.859 -4.445,13.462 -0.889,13.462 0.254,14.605 0.254,19.304 1.905,20.955 11.811,20.955 12.605,21.749 U8.31
N1039970: SW2.4 U8.30 | length 30
  Top w0.203: v1(-4.572,14.986) -3.683,14.097 -1.016,14.097 -0.178,14.935 -0.178,19.507 1.749,21.435 11.528,21.435 12.643,22.549 U8.30
  Bottom w0.203: SW2.4 -4.572,16.866 v1(-4.572,14.986)
N1040293: SW2.3 U8.29 | length 27.7
  Top w0.203: SW2.3 -4.293,16.104 -2.794,14.605 -1.143,14.605 -0.635,15.113 -0.635,19.685 1.651,21.971 11.176,21.971 12.3,23.095 12.827,23.095 13.081,23.349 U8.29
N1041168: SW2.10 U8.28 | length 29
  Top w0.203: SW2.10 -7.747,32.487 -7.747,30.861 -6.985,30.099 -5.969,30.099 -3.291,27.421 -2.275,27.421 -1.905,27.051 v1(-0.889,27.051) ; v1(2.032,24.638) 2.54,24.13 10.16,24.13 10.668,24.638 12.719,24.638 13.208,24.149 U8.28
  Bottom w0.203: v1(-0.889,27.051) 0.127,26.035 0.635,26.035 v1(2.032,24.638)
N1041815: SW2.9 U8.27 | length 24
  Top w0.203: SW2.9 -2.946,27.94 v1(-1.651,27.94) ; v1(2.921,25.4) 3.683,24.638 9.906,24.638 10.541,25.273 12.884,25.273 13.208,24.949 U8.27
  Bottom w0.203: v1(-1.651,27.94) 0.381,27.94 v1(2.921,25.4)
N1042144: SW2.8 U8.26 | length 24.9
  Top w0.203: SW2.8 -4.445,26.899 -3.023,26.899 -2.187,26.063 -1.679,26.063 v1(-1.651,26.035) ; v1(1.016,24.003) 1.016,24.892 2.254,26.13 3.334,26.13 4.318,25.146 5.969,25.146 6.572,25.749 U8.26
  Bottom w0.203: v1(-1.651,26.035) -1.016,26.035 v1(1.016,24.003)
N1042475: SW2.7 U8.25 | length 25.6
  Top w0.203: SW2.7 -3.658,26.264 v1(-2.667,25.273) ; v1(0.127,23.241) 0.127,25.019 1.778,26.67 3.556,26.67 4.572,25.654 5.715,25.654 6.35,26.289 12.446,26.289 12.706,26.549 U8.25
  Bottom w0.203: v1(-2.667,25.273) -1.397,25.273 0.127,23.749 v1(0.127,23.241)
N16800820: 
N16800826: Q5.1 Q5A.1 | length 5.6
  Top w0.203: Q5.1 53.149,25.59 v1(54.102,26.543)
  Bottom w0.203: Q5A.1 53.111,23.749 53.848,23.749 ; v1(54.102,26.543) 54.102,24.003 ; 53.848,23.749 54.102,23.749 54.102,24.003 ; 53.848,23.749 54.102,24.003
N16801104: J4.6 Q5.3 Q5A.3 | length 7.5
  Top w0.508: Q5.3 57.658,24.638 J4.6
  Bottom w0.508: Q5A.3 57.658,24.638 J4.6
N16802478: C24.1 U12.6 | length 2.5
  Top w0.381: C24.1 32.217,33.004 U12.6
N16802513: C24.2 U12.3 | length 5.6
  Top w0.381: C24.2 30.226,31.004 31.226,32.004 33.782,32.004 34.214,31.572 U12.3
N16802515: J5.1 U8.3 | length 32.8
  Top w0.203: v1(-2.413,19.939) -1.016,19.939 1.524,22.479 10.922,22.479 v1(12.319,23.876) ; v1(16.129,23.876) 17.469,22.536 U8.3
  Bottom w0.203: J5.1 -8.382,19.939 v1(-2.413,19.939) ; v1(12.319,23.876) v1(16.129,23.876)
N16804669: J5.4 U8.21 | length 34.3
  Top w0.203: J5.4 -9.652,28.702 -9.525,28.702 -8.118,27.295 -8.118,26.213 -6.858,24.953 -3.744,24.953 -3.378,24.587 -2.083,24.587 1.27,27.94 11.624,27.94 14.037,30.353 16.84,30.353 18.269,28.924 U8.21
N16827396: SW2.1 U8.24 | length 32.1
  Top w0.203: v1(13.843,27.686) 15.869,27.686 U8.24
  Bottom w0.203: SW2.1 -3.327,11.024 0.254,14.605 0.254,19.304 6.858,25.908 12.065,25.908 v1(13.843,27.686)
N16829476: SW2.2 U8.23 | length 34.2
  Top w0.203: v1(4.953,26.416) 5.334,26.797 11.938,26.797 14.478,29.337 16.415,29.337 16.669,29.083 U8.23
  Bottom w0.203: SW2.2 -2.032,13.564 -0.254,15.342 -0.254,19.685 4.953,24.892 v1(4.953,26.416)
N_RESET: J1.5 U8.8 | length 47.2
  Top w0.203: J1.5 11.938,56.515 13.208,53.213 v1(13.208,52.07) ; v1(20.447,24.638) 20.447,23.486 20.32,23.359 20.32,22.358 21.469,21.209 U8.8
  Bottom w0.203: v1(13.208,52.07) 13.843,51.435 13.843,49.911 12.827,48.895 12.827,40.259 16.383,36.703 17.653,36.703 18.288,36.068 20.02,36.068 22.352,33.736 22.352,29.718 22.098,29.464 22.098,25.781 21.336,25.019 20.979,25.019 20.598,24.638 v1(20.447,24.638)
Net5V_1: C43.1 U12.1 | length 6.8
  Top w0.508: C43.1@27.289,30.536 28.869,28.956 30.861,28.956 32.271,30.366 32.271,30.823 U12.1
NetJ4_10: J4.10 Q8.3 | length 4.4
  Top w0.508: Q8.3 56.853,11.895 J4.10
NetJ9_1: J9.1 J11.1 J14.1 PS1.ACL PS1B.ASN | length 25.3
  Bottom w1.524: PS1B.ASN 10.003,-5.618 11.146,-5.618 11.811,-4.953 20.447,-4.953 22.098,-3.302 J9.1 21.122,-0.802 J11.1 16.266,1.27 14.785,2.752 PS1.ACL
NetJ9_4: J9.4 J11.4 J14.4 PS1.ACN PS1B.ACL | length 25.3
  Bottom w1.524: PS1.ACN 35.31,2.752 33.829,1.27 J11.4 28.622,-1.082 28.098,-1.606 J9.4 28.582,-2.262 28.582,-4.318 29.217,-4.953 37.719,-4.953 38.384,-5.618 39.809,-5.618 PS1B.ACL
NetQ8_2: Q8.2 R67.2 | length 2.2
  Top w0.508: R67.2 50.721,10.869 52.758,10.869 Q8.2
PWM0: J12.2 Q3.1 U8.16 | length 34
  Top w0.203: U8.16 26.803,26.549 28.067,27.813 39.472,27.813 42.915,31.257 45.657,31.257 48.768,34.368 51.954,34.368 Q3.1
PWM1: J12.3 Q4.1 U8.15 | length 32.5
  Top w0.203: U8.15 26.892,25.749 28.321,27.178 41.347,27.178 J12.3 45.64,28.757 46.119,29.235 48.387,29.235 49.505,30.353 52.159,30.353 Q4.1
PWM2: J12.4 Q5.2 Q5A.2 R24.1 R38.2 U8.14 | length 35.5
  Top w0.203: U8.14 26.981,24.949 28.575,26.543 42.147,26.543 42.18,26.509 42.673,26.509 J12.4 43.757,25.425 46.609,25.425 46.922,25.738 R24.1
  Top w0.508: R24.1 48.811,25.738 49.657,24.892 49.657,24.3 50.419,23.538 53.111,23.538 Q5.2 53.111,23.851 v1(52.324,24.638)
  Bottom w0.203: Q5A.2@53.111,25.4 Q5A.2
  Bottom w0.508: v1(52.324,24.638) Q5A.2@53.111,25.4
PWM3: J12.5 Q7.1 U8.13 | length 42.4
  Top w0.203: U8.13 27.07,24.149 28.829,25.908 39.243,25.908 41.394,23.757 J12.5 44.196,22.487 44.196,20.574 43.637,20.015 42.342,20.015 41.656,19.329 41.656,18.034 42.164,17.526 48.108,17.526 49.505,18.923 52.159,18.923 Q7.1
PWM4: J12.6 Q8.1 R29.1 U8.12 U9.6 | length 54.1
  Top w0.203: U8.12 27.159,23.349 29.21,25.4 36.83,25.4 v1(37.719,24.511) ; R29.1 34.544,14.605 v1(35.433,15.494) ; v1(36.957,17.018) 37.719,17.78 U9.6 ; v1(36.957,21.59) 40.386,21.59 40.719,21.257 J12.6 ; v2(45.995,14.808) 46.787,14.808 47.371,14.224 51.455,14.224 Q8.1
  Bottom w0.203: v1(35.433,15.494) v1(36.957,17.018) v1(36.957,21.59) 37.719,22.352 v1(37.719,24.511) ; J12.6 44.831,19.352 44.831,17.78 45.995,16.616 v2(45.995,14.808)
PWM5: J12.7 Q6.1 U8.11 | length 29.6
  Top w0.203: U8.11 27.248,22.549 29.591,24.892 36.068,24.892 38.608,22.352 v1(40.767,22.352) ; J12.7 43.6,19.431 47.409,19.431 Q6.1
  Bottom w0.203: v1(40.767,22.352) 41.656,21.463 41.656,20.052 42.926,18.782 J12.7
STATUS: D2.1 J13.4 | length 10.7
  Top w0.203: D2.1@-7.933,39.057 D2.1 ; D2.1@-7.366,39.56 -7.302,39.56 -4.953,37.211 -4.953,35.052 J13.4
TEMPERATURE: J4.9 R34.1 | length 35.9
  Top w0.203: R34.1 27.407,13.716 39.751,13.716 41.148,12.319 43.434,12.319 43.815,12.7 43.815,13.97 45.593,15.748 47.594,15.748 48.356,14.986 v1(54.483,14.986)
  Bottom w0.203: v1(54.483,14.986) 55.626,16.129 J4.9
pads on no net: J1.3 J1.4 J9.2 J9.3 J11.2 J11.3 J11.5 J14.2 J14.3 J14.5 J23.2 J23.5 U8.9

## Polygon pours and split planes (outlines as drawn)
GND_POWER.GLOBAL on Top "Top-GND_POWER.GLOBAL" (solid, remove dead copper, pour order 1): 55.449,8.102 61.621,8.458 61.773,8.473 61.773,41.097 61.6,41.1 55.449,41.503 55.449,50.139 43.434,60.655 40.615,60.655 34.671,63.347 15.494,63.347 10.033,60.629 6.731,60.629 -5.029,50.977 -5.029,42.011 -8.474,42.011 -12.395,31.646 -12.395,18.596 -8.614,8.178 -5.054,8.178 -5.054,-0.94 4.953,-6.706 45.441,-6.706 55.449,-0.94
GND_POWER.GLOBAL on Bottom "Bottom-GND_POWER.GLOBAL" (solid, remove dead copper, pour order 0): 55.449,8.102 61.621,8.458 61.798,8.475 61.798,41.096 61.6,41.1 55.449,41.503 55.449,50.139 43.434,60.655 40.615,60.655 34.671,63.347 15.494,63.347 10.033,60.629 6.731,60.629 -5.029,50.977 -5.029,42.011 -8.407,42.011 -12.395,31.47 -12.395,18.599 -8.613,8.178 -5.054,8.178 -5.054,-0.94 4.953,-6.706 45.441,-6.706 55.449,-0.94

## Keep-outs
Keep-Out Layer:
  lines w0.025: -11.583,31.927 cw(c23.315,25.648) -8.39,41.525 ; -11.582,18.063 -11.582,31.931 ; -11.58,18.052 ccw(c24.43,24.792) -8.385,8.502 ; -8.395,8.522 -5.931,8.522 cw(c-5.923,7.589) -4.991,7.581 -4.991,2.934 ccw(c19.082,20.247) -3.035,0.496 -1.765,1.765 cw(c0,0) 1.765,-1.765 0.492,-3.038 ; -8.395,41.516 -5.626,41.516 ; -5.627,41.516 ccw(c-5.629,42.154) -4.991,42.151 -4.991,47.104 -3.023,49.505 -1.765,48.235 ccw(c0,50) 1.765,51.765 0.484,53.046 cw(c24.926,25.21) 15.456,61.024 34.506,61.023 cw(c25.029,25.062) 49.519,53.049 48.233,51.763 ccw(c49.998,49.998) 51.763,48.233 53.05,49.519 ; -1.124,6.794 ccw(c0.024,6.862) -0.948,6.247 ; -1.124,6.795 -1.124,11.829 cw(c-0.162,11.82) -0.847,12.495 0.889,14.224 0.889,18.458 cw(c2.007,18.384) 1.164,19.122 2.062,20.019 cw(c2.719,19.451) 2.727,20.32 ; -0.946,6.245 ccw(c23.627,23.838) -0.123,5.148 ; -0.117,5.14 ccw(c0.7,5.902) 0.694,4.785 ; 0.491,-3.038 ccw(c24.726,24.655) 5.938,-6.987 ; 0.694,4.785 cw(c0.99,1.016) 4.76,0.719 ; 1.137,31.115 1.137,44.365 cw(c1.959,44.458) 1.86,45.28 ; 1.137,31.115 ccw(c2.797,31.124) 2.788,29.464 ; 1.858,45.279 ccw(c0.98,48.996) 4.787,49.302 ; 2.726,20.32 10.465,20.32 ; 2.787,29.464 5.842,29.464 ; 4.445,29.464 ccw(c4.436,31.124) 6.096,31.115 ; 4.76,0.719 ccw(c5.922,0.744) 5.113,-0.091 ; 4.786,49.305 cw(c5.846,49.328) 5.14,50.118 ; 5.109,-0.088 ccw(c25.18,25.235) 9.564,-3.053 ; 5.147,50.124 cw(c25.183,24.845) 10.389,53.508 ; 5.956,-6.998 44.056,-6.998 ; 6.096,31.115 6.096,35.433 cw(c7.756,35.424) 7.747,37.084 ; 7.537,37.084 10.592,37.084 ccw(c10.589,37.893) 11.398,37.89 ; 9.585,-3.065 ccw(c10.001,-2.385) 10.038,-3.181 12.008,-3.181 ccw(c12,-2.233) 12.948,-2.242 12.948,3.499 13.887,4.439 36.112,4.439 37.052,3.499 37.052,-2.75 ccw(c37.992,-2.75) 37.992,-3.689 38.99,-3.689 ; 10.374,53.5 cw(c10.696,52.876) 11.398,52.876 11.398,37.719 ; 10.464,20.32 cw(c10.444,19.36) 11.405,19.355 11.405,13.894 12.192,13.106 39.114,13.106 cw(c39.114,12.3) 39.684,12.87 40.822,11.731 45.414,11.735 cw(c45.408,10.788) 46.355,10.796 ; 38.602,37.998 38.602,52.731 cw(c39.371,52.731) 39.726,53.414 ; 38.602,37.999 ccw(c39.296,38.007) 39.293,37.313 53.33,37.313 ccw(c53.26,38.111) 54.009,38.399 ; 38.992,-3.689 ccw(c38.94,-2.537) 39.413,-3.589 ; 39.384,-3.603 ccw(c25.49,24.143) 42.752,-1.643 ; 39.724,53.415 cw(c24.591,24.378) 44.84,50.11 ; 42.762,-1.637 ccw(c38.922,4.728) 46.355,4.832 ; 44.047,-7.003 ccw(c24.763,25.218) 49.498,-3.036 ; 44.831,50.117 cw(c44.301,49.398) 45.189,49.304 ; 45.188,49.302 ccw(c48.978,49.003) 49.283,45.214 ; 46.355,4.827 46.355,10.795 ; 49.28,45.214 cw(c49.28,44.254) 50.093,44.764 ; 49.508,-3.026 48.238,-1.756 cw(c50.003,0.01) 51.768,1.775 53.043,0.501 ; 50.101,44.754 cw(c23.94,24.29) 54.018,38.379 ; 53.048,0.507 ccw(c29.201,21.531) 55.018,2.98 ; 53.055,49.514 cw(c25.332,25.329) 55.019,47.057 ; 55.004,2.959 55.004,7.582 cw(c55.945,7.58) 55.943,8.522 58.382,8.522 ; 55.004,42.456 55.004,47.079 ; 55.004,42.457 ccw(c55.952,42.465) 55.942,41.516 ; 55.944,41.516 58.382,41.516 ; 58.382,41.515 cw(c25.739,25.24) 61.005,34.557 ; 58.408,8.574 ccw(c26.269,24.598) 61.006,15.485 ; 60.998,15.456 60.998,34.582

## Other copper
Top:
  pour cut-out: -7.366,4.953 -7.366,1.397 4.318,-10.287 50.673,-10.287 58.039,-2.921 57.658,-2.54 57.658,4.953
Bottom:
  pour cut-out: -6.871,5.575 -6.871,0.902 3.696,-9.665 51.168,-9.665 58.534,-2.299 58.153,-1.918 58.153,5.575

## Silkscreen, mask and mechanical layers (free items; w line width, h text height)
Silkscreen Top:
  lines w0.127: 30.861,-6.35 30.861,-2.667 37.084,-2.667 37.084,-6.35 30.861,-6.35
  text "GND" at -3.962,47.015 h0.89
  text "CUTOUT" at 41.529,42.037 h1.02
  text "CUTOUT" at 3.302,38.735 h1.02
  text "CUTOUT" at 20.701,8.331 h1.02
  text "REV" at 32.131,-2.413 h0.89
  text "LUX_ZQ19" at 11.43,-5.715 h1.27
Silkscreen Bottom:
  circle w0.635: c22.327,41.91 r4.504
  circle w0.127: c33.556,39.361 r0.183
  circle w0.127: c34.187,44.079 r0.211
  circle w0.127: c33.556,39.361 r0.472
  region: 29.134,37.973 35.23,37.973 35.23,36.703 29.134,36.703 29.134,37.973
  region: 31.801,42.799 33.172,42.799 33.172,42.469 31.801,42.469 31.801,42.799
  region: 33.503,39.421 33.63,39.421 33.63,39.294 33.503,39.294 33.503,39.421
  lines w0.127: 29.258,38.738 35.036,44.517 ; 29.266,44.456 35.045,38.677 ; 30.347,43.942 30.658,43.942 ; 30.594,43.942 cw(c31.249,43.833) 31.161,44.491 33.127,44.491 ; 33.118,39.178 31.097,39.178 30.658,43.942 ; 33.126,44.491 cw(c33.126,43.276) 33.976,44.144 ; 33.602,39.809 33.94,43.942 ; 34.023,43.942 30.658,43.942 ; 29.134,36.665 29.134,37.973 35.26,37.973 35.26,36.665 29.134,36.665 ; 31.024,43.96 31.024,44.536 31.298,44.536 31.298,43.96 31.024,43.96 ; 31.133,38.821 31.133,39.178 31.462,39.178 31.462,38.821 31.133,38.821 ; 31.801,42.424 31.801,42.799 33.172,42.799 33.172,42.424 31.801,42.424 ; 32.002,44.317 32.002,44.637 32.88,44.637 32.88,44.317 32.002,44.317 ; 33.858,42.9 33.858,43.421 34.398,43.421 34.398,42.9 33.858,42.9
  lines w0.635: 19.406,38.989 25.375,44.958
  text "-V" at 31.396,54.202 h0.8
  text "+V" at 41.175,54.202 h0.8
  text "Pb" at 24.105,40.259 h2.86
Layer_10:
  circle w0.1: c0,0 r1.4
  circle w0.1: c0,50 r1.4
  circle w0.025: c50.013,50.012 r1.905
  circle w0.025: c50.013,0 r1.905
  lines w0.025: 0,0 50.013,50.013 ; 0,50.013 50.013,0
Drill Drawing:
  text "CUTOUT" at 41.529,42.037 h1.02
  text "CUTOUT" at 3.302,38.735 h1.02
  text "CUTOUT" at 20.701,8.331 h1.02